# Altium PCB RotatingDUTtarget.PcbDoc
Units mil, origin at the board's own origin, x right, y up, seen from the top; angles counter-clockwise.
Board outline 2851.57 x 3101.57 mil, 2 copper layers (Top Layer, Bottom Layer), stack 62.192 mil thick; 8 components, 16 nets, 53 pads, 19 vias.
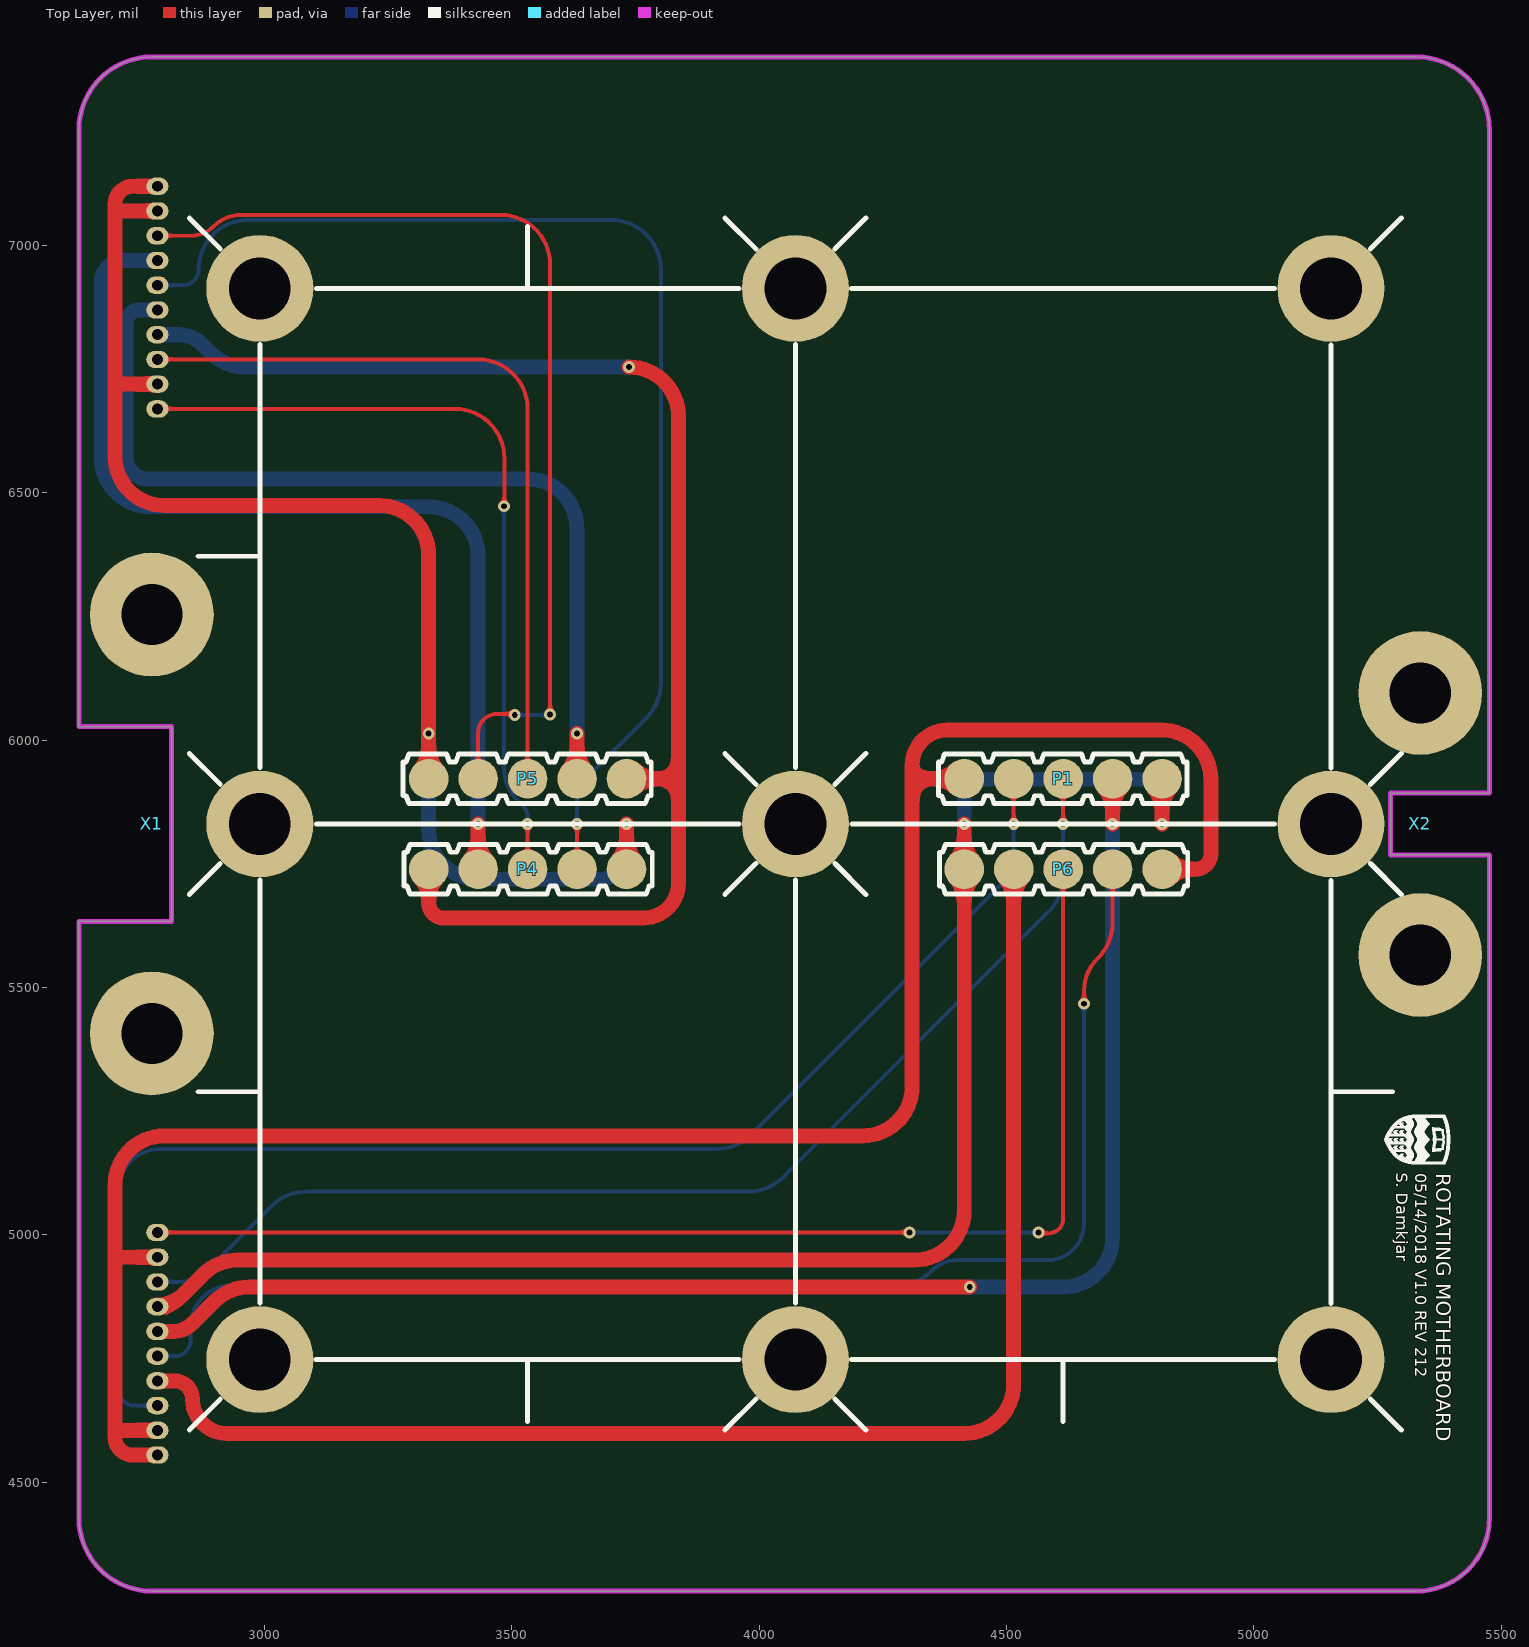
[diagram p0: Top Layer view]
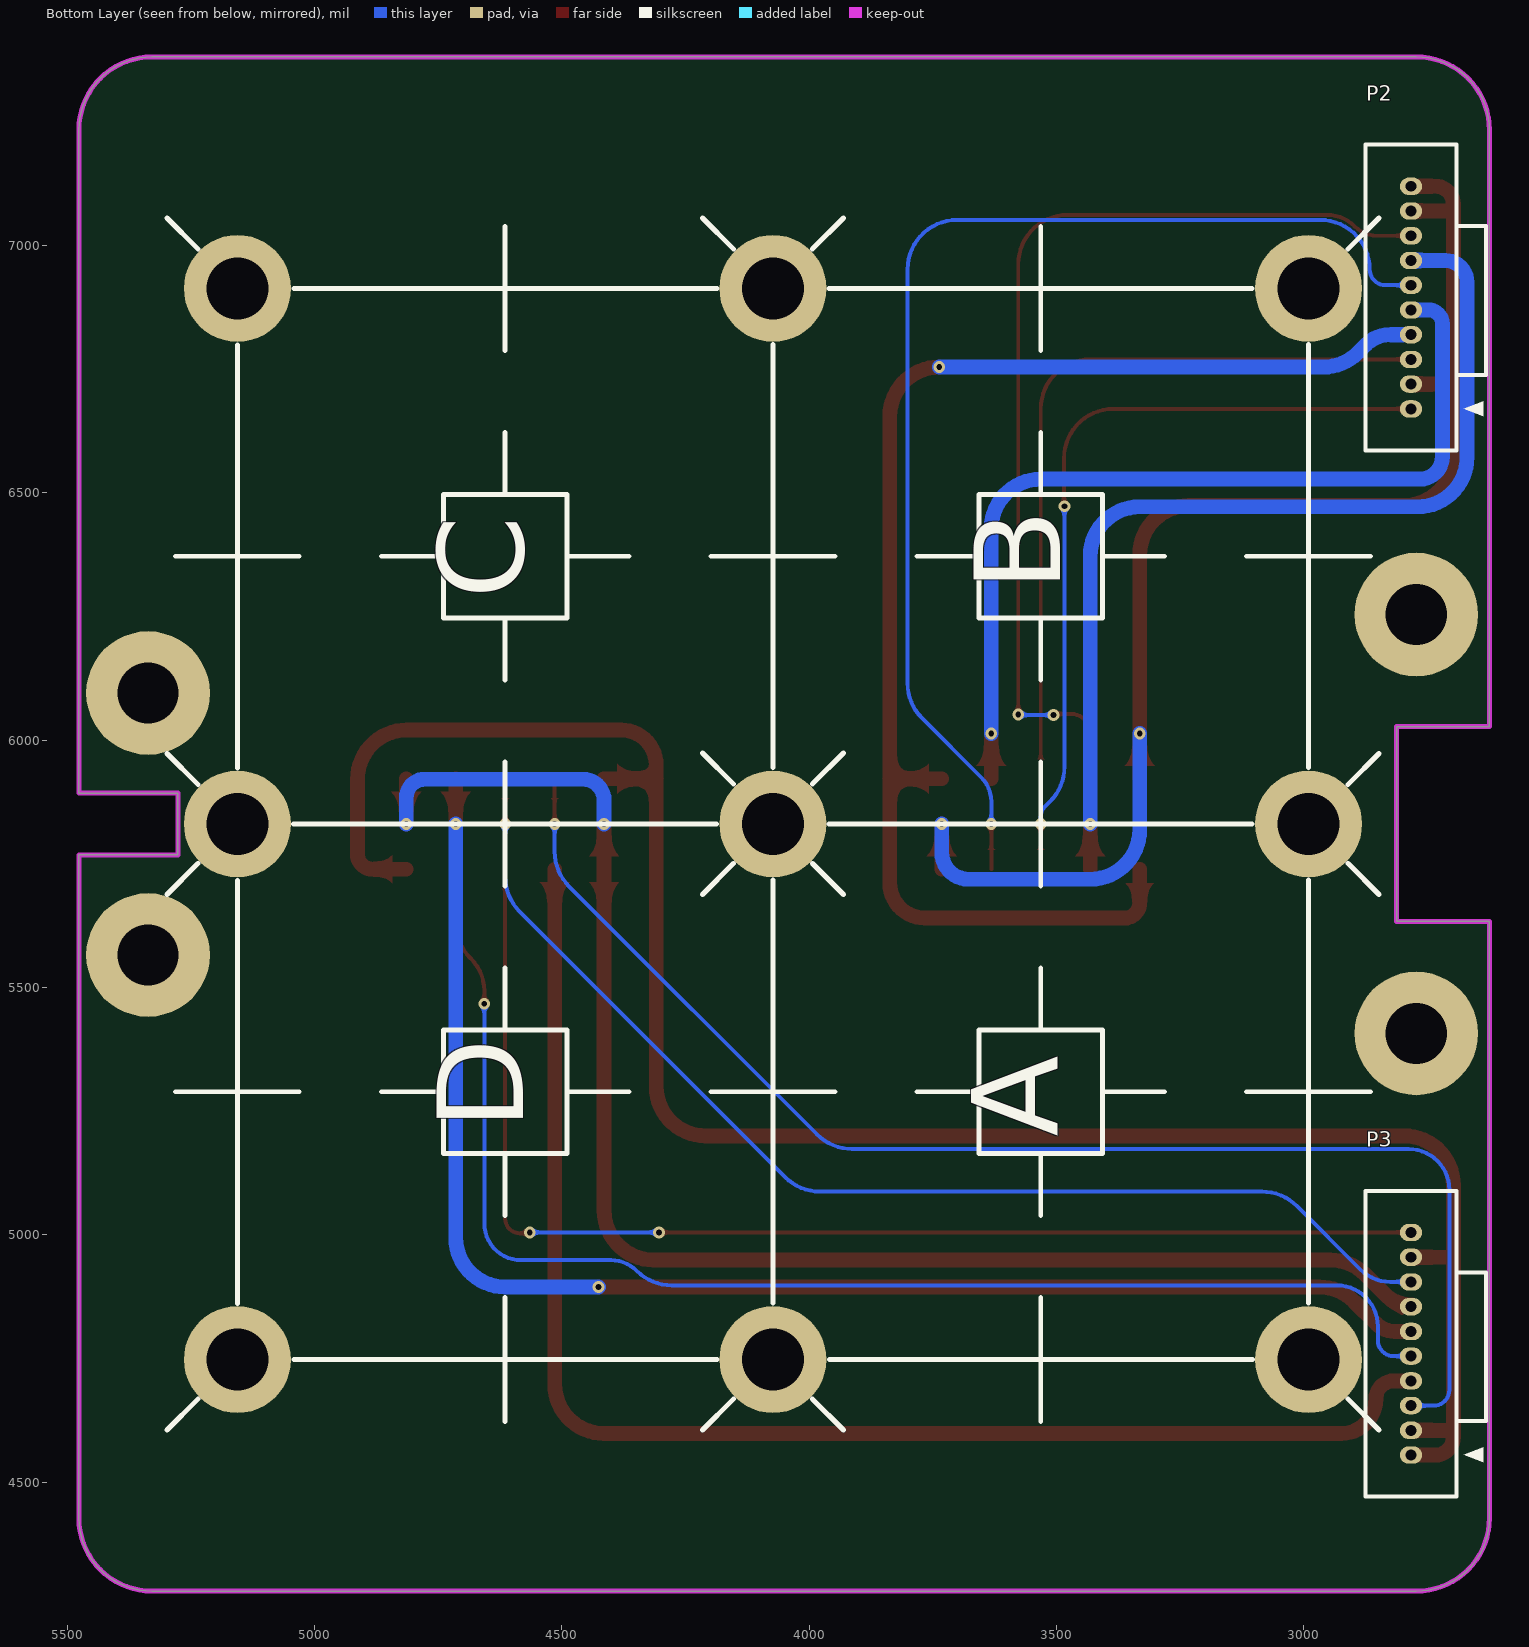
[diagram p1: Bottom Layer view, seen from below]
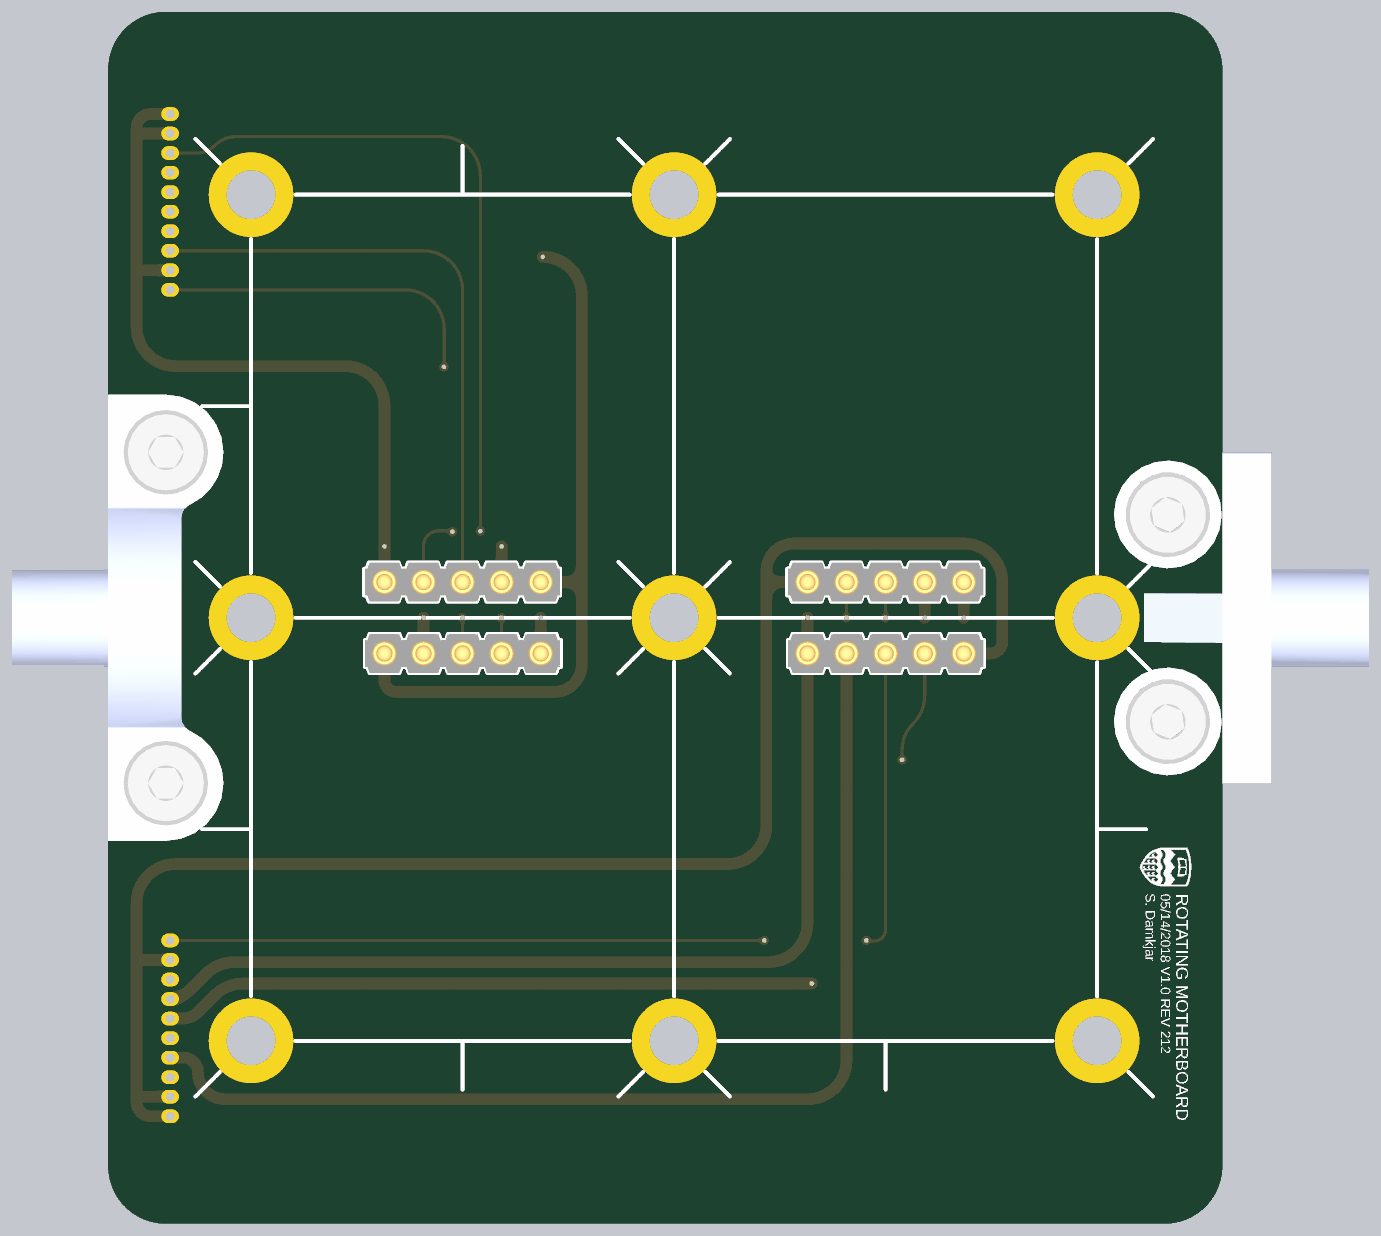
[diagram p2: 3D render of the assembled board from above, using the file's embedded part models]

## Layer stack, top to bottom
Top Solder: solder mask 0.4, Solder Resist, Dk 3.5
Top Layer: signal copper 1.4
Dielectric 1: dielectric 59.392, FR-4, Dk 4.8
Bottom Layer: signal copper 1.4
Bottom Solder: solder mask 0.4, Solder Resist, Dk 3.5

## Board outline
2772.64,4280 cw(c2772.64,4427.64) 2625,4427.64 2625,5633.94 2812.5,5633.94 2812.5,6027.64 2625,6027.64 2625,7233.93 cw(c2772.64,7233.93) 2772.64,7381.57 5328.93,7381.57 cw(c5328.93,7233.93) 5476.57,7233.93 5476.57,5893.29 5276.57,5893.29 5276.57,5768.29 5476.57,5768.29 5476.57,4427.64 cw(c5328.93,4427.64) 5328.93,4280

## Design rules (kind name [scope] priority, off if disabled: settings)
AcuteAngle [All] p1: minimum=6.00000000000000E+0001 checktracksonly=FALSE
BoardOutlineClearance [All] p1: gap=7.87 ignorepadtopadclearanceinfootprint=FALSE
Clearance [All] p1: gap=6 ignorepadtopadclearanceinfootprint=FALSE except(0: Arc-Hole Track-Hole SMDPad-Hole THPad-Hole Via-Hole Fill-Hole Poly-Hole Region-Hole Text-Hole)
Clearance ClearanceTop [OnLayer('Component Side')] p2 off: gap=4 ignorepadtopadclearanceinfootprint=FALSE except(0: Arc-Hole Track-Hole SMDPad-Hole THPad-Hole Via-Hole Fill-Hole Poly-Hole Region-Hole Text-Hole)
Clearance ClearanceTop_1 [OnLayer('Signal Layer 1')] p3 off: gap=4 ignorepadtopadclearanceinfootprint=FALSE except(0: Arc-Hole Track-Hole SMDPad-Hole THPad-Hole Via-Hole Fill-Hole Poly-Hole Region-Hole Text-Hole)
Clearance ClearanceTop_2 [OnLayer('Signal Layer 2')] p4 off: gap=4 ignorepadtopadclearanceinfootprint=FALSE except(0: Arc-Hole Track-Hole SMDPad-Hole THPad-Hole Via-Hole Fill-Hole Poly-Hole Region-Hole Text-Hole)
Clearance ClearanceBottom [OnLayer('Solder Side')] p5 off: gap=4 ignorepadtopadclearanceinfootprint=FALSE except(0: Arc-Hole Track-Hole SMDPad-Hole THPad-Hole Via-Hole Fill-Hole Poly-Hole Region-Hole Text-Hole)
Height HeightTop [OnLayer('Component Side')] p1: minheight=0 maxheight=1000 prefheight=157.48
Height HeightBottom [OnLayer('Solder Side')] p2: minheight=0 maxheight=157.48 prefheight=157.48
HoleSize [All] p1: absolutevalues=TRUE maxlimit=255.91 minlimit=7.87 maxpercent=80.000 minpercent=20.000
MinimumAnnularRing [All] p1: minimumring=4
MinimumSolderMaskSliver [All] p1: minsoldermaskwidth=3.94
PolygonConnect PolygonConnect_1 [IsVia] p1: connectstyle=Direct reliefconductorwidth=10 reliefentries=4 polygonreliefangle="90 Angle" airgapwidth=10
PolygonConnect [All] p2: connectstyle=Relief reliefconductorwidth=10 reliefentries=4 polygonreliefangle="90 Angle" airgapwidth=10
RoutingVias [All] p1: holewidth=8 width=20 viastyle="Through Hole" minholewidth=11.81 minwidth=23.81 maxholewidth=28 maxwidth=50
SMDEntry [All] p1: side=TRUE corner=FALSE anyangle=FALSE
SMDNeckDown [All] p1: percent=90.000
SMDToCorner [All] p1: distance=0
SMDToPlane [All] p1: distance=0
SilkToSilkClearance [All] p1: silktosilkclearance=6
SilkToSolderMaskClearance [IsPad] p1: minsilkscreentomaskgap=5.12 clearancetoexposedcopper=TRUE
SolderMaskExpansion [All] p1: expansion=0
UnConnectedPin [All] p1:
Width [All] p1: maxlimit=100 minlimit=6 preferedwidth=10 checkconnectedcopper=TRUE
25 further rules are at their usual default settings.

## Components (designator, comment, footprint, x,y, rotation, side; value= is the part's Value field where it differs from the comment)
P1 "811-22-005-30-000101" 811-22-005-30-000101 4814.75,5922.13 r180 top
P2 "5-104071-1" TEC-5-104071-1 2783.6,6670 r90 bottom
P3 "5-104071-1" TEC-5-104071-1 2783.6,4555 r90 bottom
P4 "811-22-005-30-000101" 811-22-005-30-000101 3332.07,5739.45 r0 top
P5 "811-22-005-30-000101" 811-22-005-30-000101 3732.07,5922.13 r180 top
P6 "811-22-005-30-000101" 811-22-005-30-000101 4414.75,5739.45 r0 top
X1 "Bearing Mount" "Bearing Mount" 2772.64,5830.79 r270 top
X2 "Servo Arm" "Servo Arm" 5336.81,5830.79 r270 top

## Footprints (in the part's own frame and the unit in brackets; to place one, negate y for a bottom-side part, rotate by r counter-clockwise, add the part's x,y. Pads: shape width x height; smd on the part's side, far side on the other; paste and mask are expansions set on the pad)
811-22-005-30-000101 [mil]
  round 80 smd: 1(0,0) 2(100,0) 3(200,0) 4(300,0) 5(400,0)
  silkscreen extent -50,-50 452,50, body extent -50,-50 450,50, height 137
"Bearing Mount" [mm]
  round 6.35 hole 3.15: 7(-10.755,0) 7(10.755,0)
  body extent -14.5,-10.01 14.5,3.75, height 7.37
"Servo Arm" [mm]
  round 6.35 hole 3.15: 7(-6.727,0) 7(6.727,0)
  body extent -10.77,-3.99 10.77,13.08, height 2.74
TEC-5-104071-1 [mil]
  oval 35x45 hole 22.01: 1(0,0) 2(50,0) 3(100,0) 4(150,0) 5(200,0) 6(250,0) 7(300,0) 8(350,0) 9(400,0) 10(450,0)
  silkscreen extent -84,-152 534,92, body extent -147,-152 597,92, height 390

## Part data
P1 P4 P5 P6: library part PP-MMM-00001, "CONN SPRING CONT 05 POS .137 SMD", Supplier Part Number 1=ED8110-05-ND, Index=1, LatestRevisionDate=2018-05-10, LatestRevisionNote=..., Manufacturer Part Number=811-22-005-30-000101, Part Number=PP-MMM-00001, Published=2018-05-10, Publisher=AlbertaSat, Supplier 1=Digi-key, Supplier 2=Mouser, Supplier Link=#https://www.digikey.ca/product-detail/en/mill-max-manufacturing-corp/811-22-005-30-000101/ED8110-05-ND/682273#, Supplier Part Number 2=575-8112200530000101
P2 P3: library part 458, "CONN HEADER 10POS .050 VERT GOLD", Supplier Part Number 1=5-104071-1-ND, LatestRevisionDate=17-Jul-2002, LatestRevisionNote="Re-released for DXP Platform.", Manufacturer Part Number=5-104071-1, Part Number=458, Publisher="Altium Limited", Supplier 1=Digi-Key, Supplier Link=http://www.digikey.ca/product-search/en?keywords=5-104071-1-ND

## Free pads (board coordinates)
  round 216.54 hole 125: 4(4073.41,5830.79) 5(5156.09,6913.47) 6(4073.41,6913.47) 7(2990.73,6913.47) 8(2990.73,5830.79) 9(5156.09,5830.79) 10(5156.09,4748.11) 11(4073.41,4748.11) 12(2990.73,4748.11)

## Via types
v1: diameter 23.81, hole 11.81, Top Layer to Bottom Layer, tented both sides, 19 vias

## Nets (pads, with @x,y where several pads share a name; then routed paths per layer and width w, separated by ;. In a path a pad name is that pad's centre, name@x,y a point inside that pad or via, vN(x,y) a via of type N, cw(c..) or ccw(c..) an arc to the next point about the centre after c; other vN are vias at no path point)
3V3AB: P2.4 P4.1 P5.1 | length 2810.1
  Top Layer w30: P4.1 3332.07,5671.13 ccw(c3362.5,5671.13) 3362.5,5640.7 3766.32,5640.7 ccw(c3766.32,5711.65) 3837.27,5711.65 3837.27,5922.13 ; P5.1 3837.27,5922.13 ; v1(3737.27,6754.52) cw(c3737.27,6654.52) 3837.27,6654.52 3837.27,5922.13
  Bottom Layer w30: P2.4 2826.7,6820 cw(c2826.7,6752.9) 2874.14,6800.35 2890.69,6783.81 ccw(c2961.4,6854.52) 2961.4,6754.52 v1(3737.27,6754.52)
3V3CD: P1.1 P3.7 P6.1 | length 3139.7
  Top Layer w30: P3.7 ccw(c2783.6,4921.37) 2830.53,4874.44 2876.18,4920.09 cw(c2946.89,4849.38) 2946.89,4949.38 4314.75,4949.38 ccw(c4314.75,5049.38) 4414.75,5049.38 P6.1 v1(4414.75,5830.79) ; v1(4814.75,5830.79) P1.1
  Bottom Layer w30: v1(4414.75,5830.79) 4414.75,5878.64 cw(c4457.51,5878.64) 4457.51,5921.4 4777.2,5921.4 cw(c4777.2,5883.85) 4814.75,5883.85 v1(4814.75,5830.79)
GNDAB: P2.2 P2.9 P2.10 P4.5 P5.5 | length 2820.8
  Top Layer w30: P2.2 2698.77,6720 cw(c2698.77,6720.89) 2697.88,6720.89 ; P2.9 2699.72,7070 ccw(c2699.72,7068.16) 2697.88,7068.16 ; P2.10 2733.98,7120 ccw(c2733.98,7083.89) 2697.88,7083.89 2697.88,7068.16 ; P5.5 v1(3332.07,6013.47) 3332.07,6374.68 ccw(c3232.07,6374.68) 3232.07,6474.68 2797.88,6474.68 cw(c2797.88,6574.68) 2697.88,6574.68 2697.88,6720.89 ; P4.5 v1(3732.07,5830.79) ; 2697.88,6720.89 2697.88,7068.16
  Bottom Layer w30: v1(3332.07,6013.47) 3332.07,5819.13 ccw(c3432.07,5819.13) 3432.07,5719.13 3678.27,5719.13 ccw(c3678.27,5772.94) 3732.07,5772.94 v1(3732.07,5830.79)
GNDCD: P1.5 P3.1 P3.2 P3.9 P6.5 | length 4237.8
  Top Layer w30: P3.1 2733.98,4555 cw(c2733.98,4591.11) 2697.88,4591.11 2697.88,4606.84 ; P3.2 2699.72,4605 cw(c2699.72,4606.84) 2697.88,4606.84 ; P3.9 2698.77,4955 ccw(c2698.77,4954.11) 2697.88,4954.11 ; P1.5 4309.55,5922.13 ; P6.5 4883.07,5739.45 ccw(c4883.07,5769.88) 4913.5,5769.88 4913.5,5920.88 ccw(c4813.5,5920.88) 4813.5,6020.88 4380.5,6020.88 ccw(c4380.5,5949.93) 4309.55,5949.93 4309.55,5922.13 ; 2697.88,4606.84 2697.88,4954.11 ; 2697.88,4954.11 2697.88,5100.32 cw(c2797.88,5100.32) 2797.88,5200.32 4209.55,5200.32 ccw(c4209.55,5300.32) 4309.55,5300.32 4309.55,5922.13
NetP1_3: P1.3 P3.8 | length 2376
  Top Layer w8: v1(4614.75,5830.79) P1.3
  Bottom Layer w8: P3.8 2825.17,4905 ccw(c2825.17,4991.26) 2886.17,4930.27 3014.33,5058.43 cw(c3085.04,4987.71) 3085.04,5087.71 3978.26,5087.71 ccw(c3978.26,5187.71) 4048.97,5117 4585.46,5653.49 ccw(c4514.75,5724.2) 4614.75,5724.2 v1(4614.75,5830.79)
NetP1_4: P1.4 P3.3 | length 2767.9
  Top Layer w8: v1(4514.75,5830.79) P1.4
  Bottom Layer w8: P3.3 2737.47,4655 cw(c2737.47,4686.39) 2706.08,4686.39 2706.08,5091.54 cw(c2788.3,5091.54) 2788.3,5173.76 3913.25,5173.76 ccw(c3913.25,5273.76) 3983.96,5203.05 4485.46,5704.54 ccw(c4414.75,5775.25) 4514.75,5775.25 v1(4514.75,5830.79)
NetP2_1: P2.1 P4.3 | length 1603.8
  Top Layer w8: P2.1 3385.11,6670 cw(c3385.11,6570) 3485.11,6570 3485.11,6475.42 ccw(c3487.48,6473.04) v1(3484.12,6473.04) ; P4.3 v1(3532.07,5830.79)
  Bottom Layer w8: v1(3484.12,6473.04) 3484.12,5946.82 ccw(c3584.12,5946.82) 3513.41,5876.11 3524.42,5865.1 cw(c3505.94,5846.62) 3532.07,5846.62 v1(3532.07,5830.79)
NetP2_3: P2.3 P5.3 | length 1553.4
  Top Layer w8: P2.3 3432.07,6770 cw(c3432.07,6670) 3532.07,6670 P5.3
NetP2_6: P2.6 P4.4 | length 2425.6
  Top Layer w8: P4.4 v1(3632.07,5830.79)
  Bottom Layer w8: P2.6 2835.06,6920 ccw(c2835.06,6951.97) 2867.03,6951.97 cw(c2967.03,6951.97) 2967.03,7051.97 3701.4,7051.97 cw(c3701.4,6951.97) 3801.4,6951.97 3801.4,6115.56 cw(c3701.4,6115.56) 3772.11,6044.85 3652.57,5925.32 ccw(c3702.07,5875.82) 3632.07,5875.82 v1(3632.07,5830.79)
NetP2_8: P2.8 P5.4 | length 2036.6
  Top Layer w8: P2.8 2851.71,7020 ccw(c2851.71,7084.58) 2897.38,7038.92 cw(c2953.69,6982.6) 2953.69,7062.24 3477.53,7062.24 cw(c3477.53,6962.24) 3577.53,6962.24 v1(3577.53,6052.25) ; P5.4 3432.07,6014.88 cw(c3470.56,6014.88) 3470.56,6053.37 3503.9,6053.37 ccw(c3506.13,6053.37) v1(3506.13,6051.14)
  Bottom Layer w8: v1(3506.13,6051.14) 3578.65,6051.14 cw(c3578.65,6052.25) v1(3577.53,6052.25)
NetP3_5: P3.5 P6.4 | length 2754.9
  Top Layer w8: v1(4657.01,5467.32) 4657.01,5493.49 cw(c4748.85,5493.49) 4683.91,5558.43 4685.46,5559.99 ccw(c4614.75,5630.7) 4714.75,5630.7 P6.4
  Bottom Layer w8: P3.5 2818.53,4755 ccw(c2818.53,4787.12) 2850.65,4787.12 2850.65,4815.19 cw(c2933.57,4815.19) 2933.57,4898.1 4278.08,4898.1 ccw(c4278.08,4998.1) 4348.79,4927.39 cw(c4400.75,4875.43) 4400.75,4948.91 4582.39,4948.91 ccw(c4582.39,5023.53) 4657.01,5023.53 v1(4657.01,5467.32)
NetP3_10: P3.10 P6.3 | length 2555.6
  Top Layer w8: P3.10 v1(4304.06,5005) ; v1(4565.13,5005) cw(c4565.13,5003.31) 4566.82,5003.31 4585.19,5003.31 ccw(c4585.19,5032.87) 4614.75,5032.87 P6.3
  Bottom Layer w8: v1(4304.06,5005) v1(4565.13,5005)
VA: P2.7 P4.2 | length 2001.1
  Top Layer w30: P4.2 v1(3432.07,5830.79)
  Bottom Layer w30: P2.7 2714.31,6970 ccw(c2714.31,6925.86) 2670.17,6925.86 2670.17,6572.12 ccw(c2770.17,6572.12) 2770.17,6472.12 3332.07,6472.12 cw(c3332.07,6372.12) 3432.07,6372.12 v1(3432.07,5830.79)
VB: P2.5 P5.2 | length 1848.7
  Top Layer w30: P5.2 v1(3632.07,6013.47)
  Bottom Layer w30: P2.5 2748.22,6870 ccw(c2748.22,6841.93) 2720.16,6841.93 2720.16,6573.46 ccw(c2765.66,6573.46) 2765.66,6527.96 3532.07,6527.96 cw(c3532.07,6427.96) 3632.07,6427.96 v1(3632.07,6013.47)
VC: P1.2 P3.6 | length 2946.2
  Top Layer w30: P3.6 2816.1,4805 ccw(c2816.1,4858.5) 2853.93,4820.67 2898.74,4865.48 cw(c2969.46,4794.77) 2969.46,4894.77 v1(4425.97,4894.77) ; v1(4714.75,5830.79) P1.2
  Bottom Layer w30: v1(4425.97,4894.77) 4614.75,4894.77 ccw(c4614.75,4994.77) 4714.75,4994.77 v1(4714.75,5830.79)
VD: P3.4 P6.2 | length 2889.8
  Top Layer w30: P3.4 2818.13,4705 cw(c2818.13,4668.51) 2854.62,4668.51 ccw(c2924.51,4668.51) 2924.51,4598.62 4414.75,4598.62 ccw(c4414.75,4698.62) 4514.75,4698.62 P6.2
pads on no net: X1.7 X2.7

## Polygon pours and split planes (outlines as drawn)
no net on Bottom Layer "Bottom Layer-No Net" (solid, pour order 8): 4097.12,6635.71
no net on Bottom Layer "Bottom Layer-No Net 1" (solid, pour order 4): 4097.52,6355.26

## Keep-outs
Keep-Out Layer:
  the board outline again, w10

## Silkscreen, mask and mechanical layers (free items; w line width, h text height)
Top Overlay:
  drawing of 1894 lines, arcs and shapes, not listed
  text "S. Damkjar" at 5280.05,5125.72 h40 r270
  text "05/14/2018 V1.0 REV 212" at 5318.88,5124.62 h40 r270
  text "ROTATING MOTHERBOARD" at 5358.46,5124.38 h50 r270
Bottom Overlay:
  lines w10: 2848.23,4605.61 2910.73,4668.11 ; 2848.23,5688.29 2910.73,5750.79 ; 2848.23,5973.29 2910.73,5910.79 ; 2848.23,7055.97 2910.73,6993.47 ; 2865.73,5289.45 3115.73,5289.45 ; 2865.73,6372.13 3115.73,6372.13 ; 2990.73,4862.25 2990.73,5717.25 ; 2990.73,5944.93 2990.73,6799.93 ; 3104.27,4748.11 3959.27,4748.11 ; 3104.87,5830.79 3959.87,5830.79 ; 3104.87,6913.47 3959.87,6913.47 ; 3282.07,5289.45 3407.07,5289.45 ; 3282.07,6372.13 3407.07,6372.13 ; 3532.07,4623.11 3532.07,4873.11 ; 3532.07,5039.45 3532.07,5164.45 ; 3532.07,5539.45 3532.07,5414.45 ; 3532.07,5705.79 3532.07,5955.79 ; 3532.07,6122.13 3532.07,6247.13 ; 3532.07,6622.13 3532.07,6497.13 ; 3532.07,6788.47 3532.07,7038.47 ; 3782.07,5289.45 3657.07,5289.45 ; 3782.07,6372.13 3657.07,6372.13 ; 3930.91,4605.61 3993.41,4668.11 ; 3930.91,5688.29 3993.41,5750.79 ; 3930.91,5974.43 3993.41,5911.93 ; 3930.91,7055.97 3993.41,6993.47 ; 3948.41,5289.45 4198.41,5289.45 ; 3948.41,6372.13 4198.41,6372.13 ; 4073.41,4862.25 4073.41,5717.25 ; 4073.41,5944.93 4073.41,6799.93 ; 4153.41,4668.11 4215.91,4605.61 ; 4153.41,5750.79 4215.91,5688.29 ; 4153.41,5911.93 4215.91,5974.43 ; 4153.41,6993.47 4215.91,7055.97 ; 4186.95,4748.11 5041.95,4748.11 ; 4186.95,6913.47 5041.95,6913.47 ; 4187.55,5830.79 5042.55,5830.79 ; 4364.75,5289.45 4489.75,5289.45 ; 4364.75,6372.13 4489.75,6372.13 ; 4614.75,4623.11 4614.75,4873.11 ; 4614.75,5039.45 4614.75,5164.45 ; 4614.75,5539.45 4614.75,5414.45 ; 4614.75,5705.79 4614.75,5955.79 ; 4614.75,6122.13 4614.75,6247.13 ; 4614.75,6622.13 4614.75,6497.13 ; 4864.75,5289.45 4739.75,5289.45 ; 4864.75,6372.13 4739.75,6372.13 ; 5031.09,5289.45 5281.09,5289.45 ; 5031.09,6372.13 5281.09,6372.13 ; 5156.09,4861.65 5156.09,5716.65 ; 5156.09,5944.33 5156.09,6799.33 ; 5236.09,4668.11 5298.59,4605.61 ; 5236.09,5750.79 5298.59,5688.29 ; 5236.09,5910.79 5298.59,5973.29 ; 5236.09,6993.47 5298.59,7055.97 ; 3407.07,5289.45 3407.07,5414.45 3532.07,5414.45 ; 3407.07,5289.45 3407.07,5164.45 3532.07,5164.45 ; 3407.07,6372.13 3407.07,6247.13 3532.07,6247.13 ; 3407.07,6372.13 3407.07,6497.13 3532.07,6497.13 ; 3532.07,5164.45 3657.07,5164.45 3657.07,5289.45 ; 3532.07,5414.45 3657.07,5414.45 3657.07,5289.45 ; 3532.07,6247.13 3657.07,6247.13 3657.07,6372.13 ; 3532.07,6497.13 3657.07,6497.13 3657.07,6372.13 ; 4489.75,5289.45 4489.75,5414.45 4614.75,5414.45 ; 4489.75,5289.45 4489.75,5164.45 4614.75,5164.45 ; 4489.75,6372.13 4489.75,6497.13 4614.75,6497.13 ; 4489.75,6372.13 4489.75,6247.13 4614.75,6247.13 ; 4614.75,5164.45 4739.75,5164.45 4739.75,5289.45 ; 4614.75,5414.45 4739.75,5414.45 4739.75,5289.45 ; 4614.75,6247.13 4739.75,6247.13 4739.75,6372.13 ; 4614.75,6497.13 4739.75,6497.13 4739.75,6372.13 ; 4614.75,6788.47 4614.75,7038.47 4614.75,6788.47
  text "B" at 3434.9,6300.97 h300 r270
  text "C" at 4519.37,6285.65 h300 r270
  text "D" at 4521.07,5213.1 h300 r270
  text "A" at 3440.33,5198.56 h300 r270